# Altium PCB A3000_Backplane.PcbDoc
Units mm, origin at the board's own origin, x right, y up, seen from the top; angles counter-clockwise.
Board outline 251.97 x 57.53 mm, 4 copper layers (Top Layer, 5V, 12V, Bottom Layer), stack 1.741 mm thick; 13 components, 62 nets, 302 pads, 119 vias.
Unrouted connection lines stored in the file: 2.
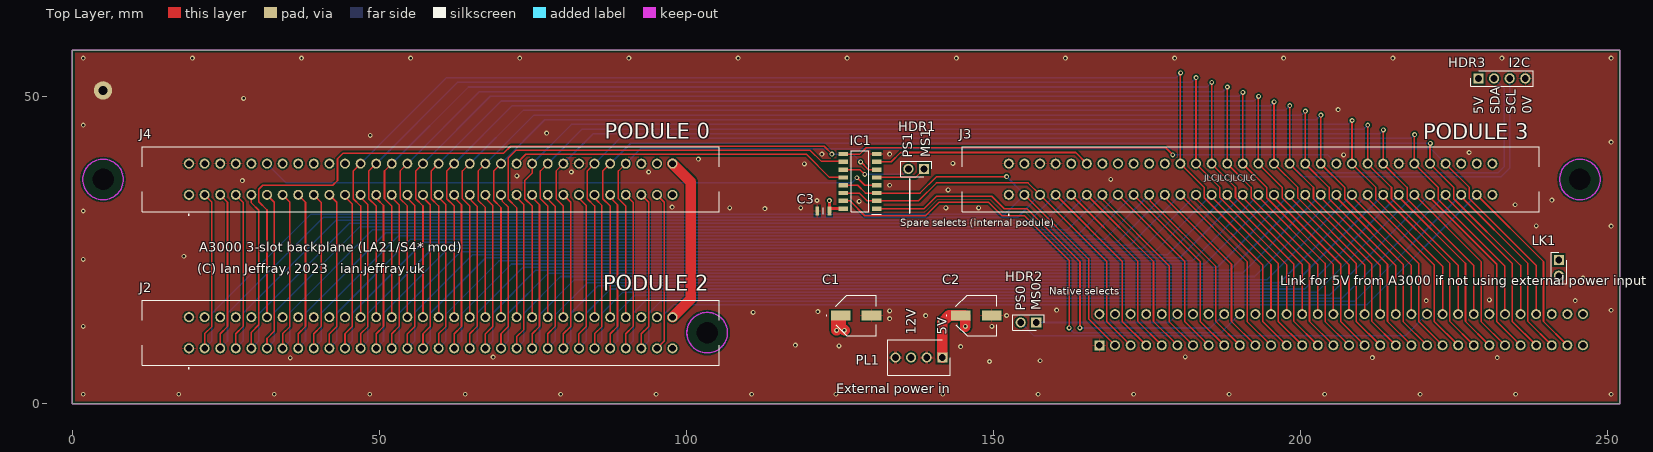
[diagram p0: Top Layer view]
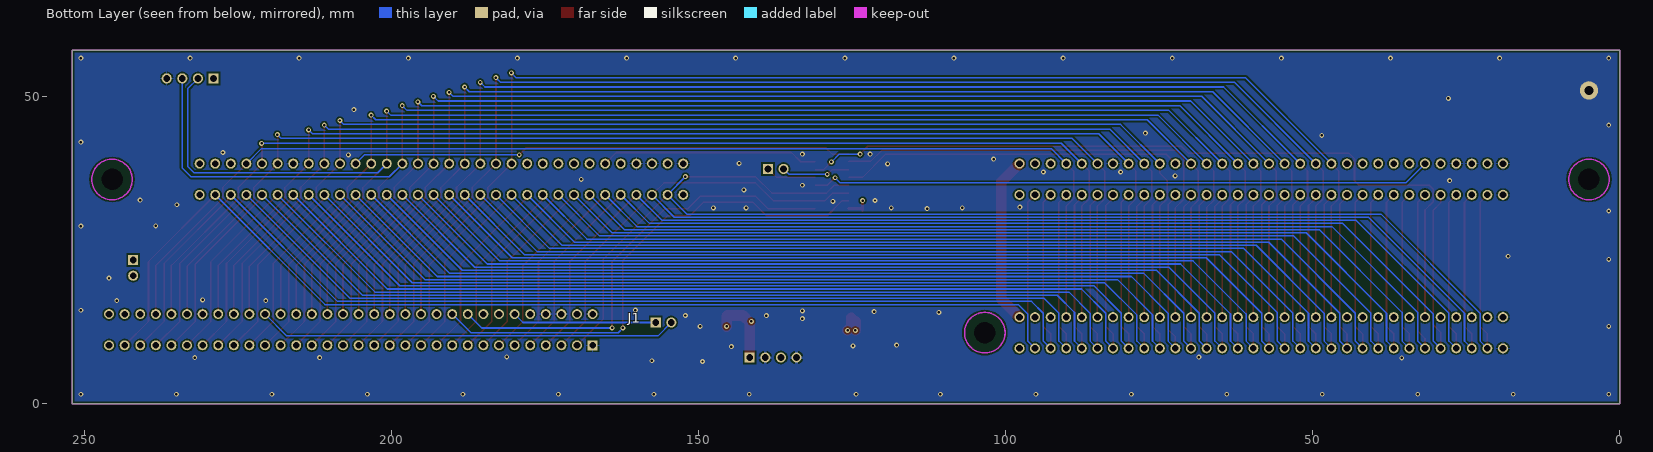
[diagram p1: Bottom Layer view, seen from below]
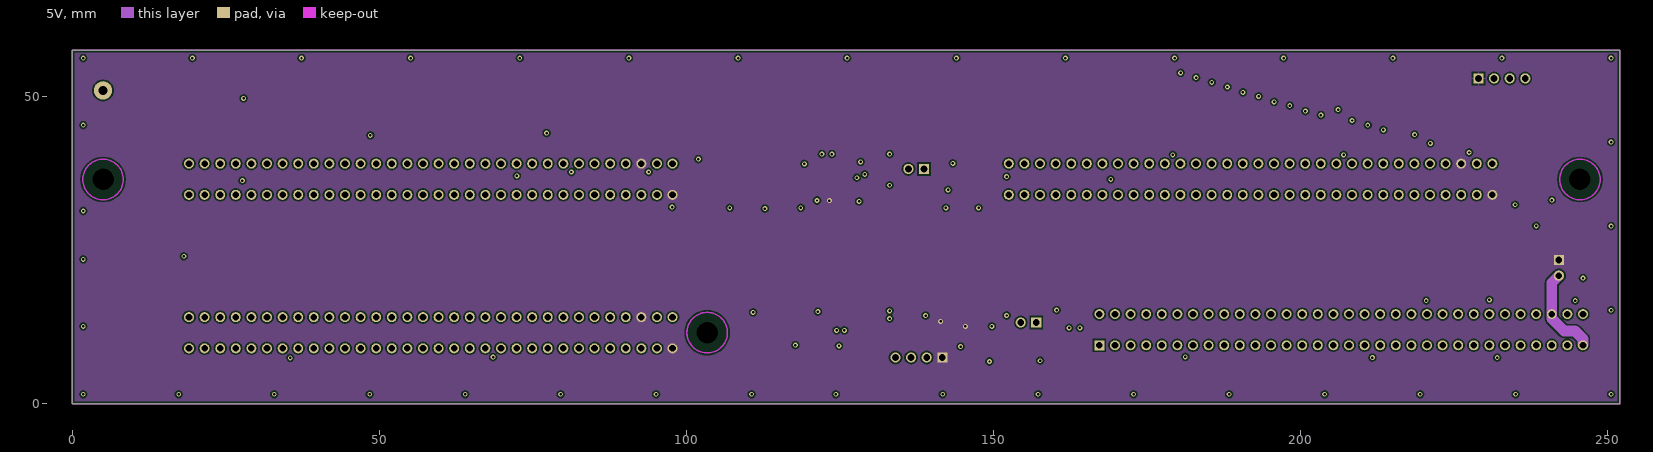
[diagram p2: 5V]
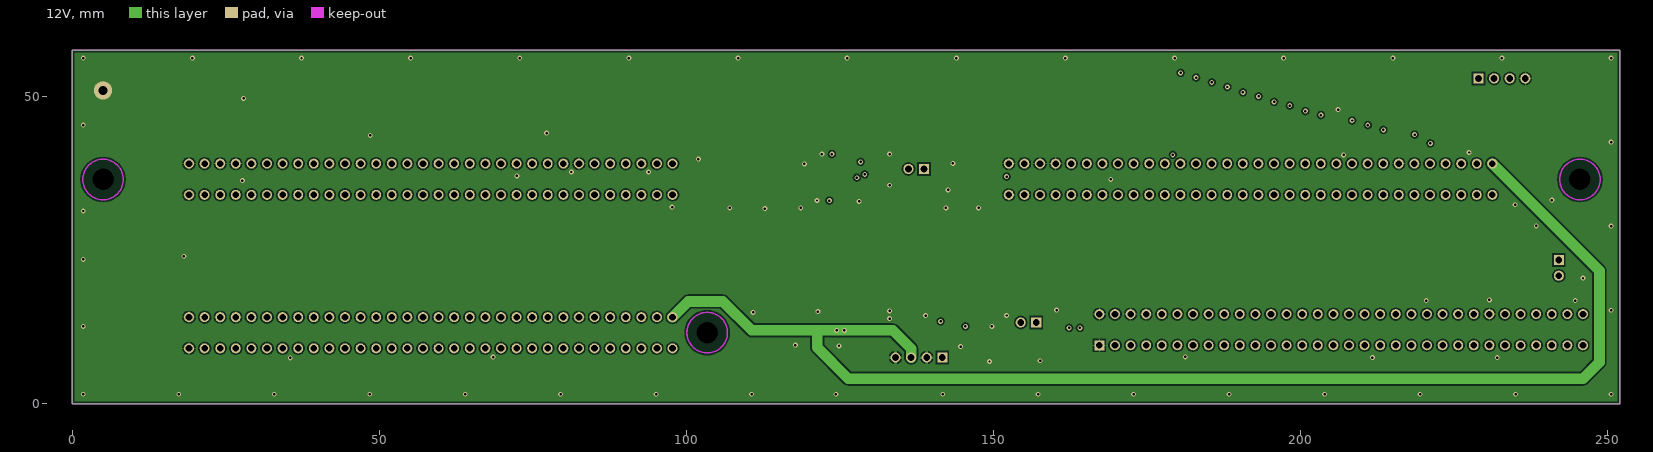
[diagram p3: 12V]
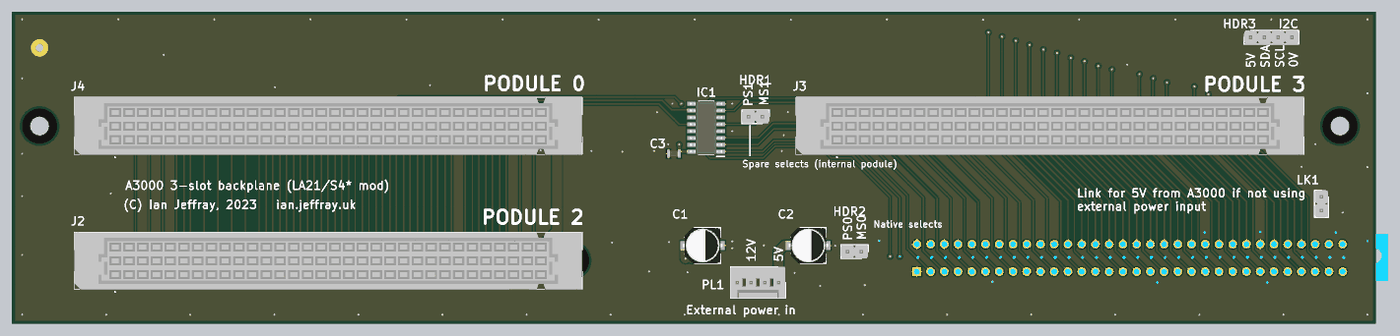
[diagram p4: 3D render of the assembled board from above, using the file's embedded part models]

## Layer stack, top to bottom
Top Solder: solder mask 0.0102, Solder Resist, Dk 3.5
Top Layer: signal copper 0.0356
Dielectric 1: dielectric 0.2, FR-4, Dk 4.8
5V: signal copper 0.035
Dielectric 2: core 1.2, PP-006, Dk 4.1
12V: signal copper 0.035
Dielectric2: dielectric 0.2, FR-4, Dk 4.8
Bottom Layer: signal copper 0.0356
Bottom Solder: solder mask 0.0102, Solder Resist, Dk 3.5

## Board outline
0,0 0,57.531 251.968,57.531 251.968,0

## Design rules (kind name [scope] priority, off if disabled: settings)
Clearance [All] p1: gap=0.254 ignorepadtopadclearanceinfootprint=FALSE except(0: Arc-Hole Track-Hole SMDPad-Hole THPad-Hole Via-Hole Fill-Hole Poly-Hole Region-Hole Text-Hole)
PolygonConnect [All] p1: connectstyle=Relief reliefconductorwidth=0.254 reliefentries=4 polygonreliefangle="90 Angle" airgapwidth=0.254
RoutingVias [All] p1: holewidth=0.711 width=1.27 viastyle="Through Hole" minholewidth=0.711 minwidth=1.27 maxholewidth=0.711 maxwidth=1.27
SolderMaskExpansion [All] p1: expansion=0.102 istentingtop=FALSE
Width [All] p1: maxlimit=0.254 minlimit=0.254 preferedwidth=0.254
30 further rules are at their usual default settings.

## Classes and differential pairs
component class A3000_Backplane: C3 HDR1 HDR2 HDR3 IC1 J1 J2 J3 J4 LK1 PL1

## Components (designator, comment, footprint, x,y, rotation, side; value= is the part's Value field where it differs from the comment)
C1 "100uF" EEE0JA331XP 127.635,14.351 r0 top
C2 "100uF" EEE0JA331XP 147.193,14.351 r0 top
C3 "100nF" CAPC2012X145N 122.301,31.369 r0 top
HDR1 "90120-0762" HDRV2W35P0X254_1X2_508X249X560P 138.684,38.227 r180 top
HDR2 "90120-0762" HDRV2W35P0X254_1X2_508X249X560P 156.972,13.208 r180 top
HDR3 "90120-0764" HDRV4W90P0X254_1X4_994X249X560P 228.981,52.959 r0 top
IC1 "74HC139D" SOIC127P600X175-16N 128.27,36.195 r180 top locked
J1 "09731646907" 56509455 167.25,9.5 r180 bottom
J2 "5650956-5" 56509565 19,9 r180 top locked
J3 "5650956-5" 56509565 152.5,34 r180 top locked
J4 "5650956-5" 56509565 19,34 r180 top locked
LK1 "90120-0762" HDRV2W35P0X254_1X2_508X249X560P 242.062,23.368 r270 top
PL1 "22-27-2041" SHDR4W64P0X254_1X4_1016X580X1170P 141.669,7.504 r180 top

## Footprints (in the part's own frame and the unit in brackets; to place one, negate y for a bottom-side part, rotate by r counter-clockwise, add the part's x,y. Pads: shape width x height; smd on the part's side, far side on the other; paste and mask are expansions set on the pad)
56509455 [mm]
  rect 1.62x1.62 hole 1.08: A1(0,0)
  round 1.62 hole 1.08: A2(-2.54,0) A3(-5.08,0) A4(-7.62,0) A5(-10.16,0) A6(-12.7,0) A7(-15.24,0) A8(-17.78,0) A9(-20.32,0) A10(-22.86,0) A11(-25.4,0) A12(-27.94,0) A13(-30.48,0) A14(-33.02,0) A15(-35.56,0) A16(-38.1,0) A17(-40.64,0) A18(-43.18,0) A19(-45.72,0) A20(-48.26,0) A21(-50.8,0) A22(-53.34,0) A23(-55.88,0) A24(-58.42,0) A25(-60.96,0) A26(-63.5,0) A27(-66.04,0) A28(-68.58,0) A29(-71.12,0) A30(-73.66,0) A31(-76.2,0) A32(-78.74,0) C1(0,5.08) C2(-2.54,5.08) C3(-5.08,5.08) C4(-7.62,5.08) C5(-10.16,5.08) C6(-12.7,5.08) C7(-15.24,5.08) C8(-17.78,5.08) C9(-20.32,5.08) C10(-22.86,5.08) C11(-25.4,5.08) C12(-27.94,5.08) C13(-30.48,5.08) C14(-33.02,5.08) C15(-35.56,5.08) C16(-38.1,5.08) C17(-40.64,5.08) C18(-43.18,5.08) C19(-45.72,5.08) C20(-48.26,5.08) C21(-50.8,5.08) C22(-53.34,5.08) C23(-55.88,5.08) C24(-58.42,5.08) C25(-60.96,5.08) C26(-63.5,5.08) C27(-66.04,5.08) C28(-68.58,5.08) C29(-71.12,5.08) C30(-73.66,5.08) C31(-76.2,5.08) C32(-78.74,5.08)
  body extent -87.07,-2.9 7.93,8.2, height 21.6
56509565 [mm]
  round 1.62 hole 1.08: A1(0,0) A2(-2.54,0) A3(-5.08,0) A4(-7.62,0) A5(-10.16,0) A6(-12.7,0) A7(-15.24,0) A8(-17.78,0) A9(-20.32,0) A10(-22.86,0) A11(-25.4,0) A12(-27.94,0) A13(-30.48,0) A14(-33.02,0) A15(-35.56,0) A16(-38.1,0) A17(-40.64,0) A18(-43.18,0) A19(-45.72,0) A20(-48.26,0) A21(-50.8,0) A22(-53.34,0) A23(-55.88,0) A24(-58.42,0) A25(-60.96,0) A26(-63.5,0) A27(-66.04,0) A28(-68.58,0) A29(-71.12,0) A30(-73.66,0) A31(-76.2,0) A32(-78.74,0) C1(0,-5.08) C2(-2.54,-5.08) C3(-5.08,-5.08) C4(-7.62,-5.08) C5(-10.16,-5.08) C6(-12.7,-5.08) C7(-15.24,-5.08) C8(-17.78,-5.08) C9(-20.32,-5.08) C10(-22.86,-5.08) C11(-25.4,-5.08) C12(-27.94,-5.08) C13(-30.48,-5.08) C14(-33.02,-5.08) C15(-35.56,-5.08) C16(-38.1,-5.08) C17(-40.64,-5.08) C18(-43.18,-5.08) C19(-45.72,-5.08) C20(-48.26,-5.08) C21(-50.8,-5.08) C22(-53.34,-5.08) C23(-55.88,-5.08) C24(-58.42,-5.08) C25(-60.96,-5.08) C26(-63.5,-5.08) C27(-66.04,-5.08) C28(-68.58,-5.08) C29(-71.12,-5.08) C30(-73.66,-5.08) C31(-76.2,-5.08) C32(-78.74,-5.08)
  round 4.335 on Mech16: MH1(-84.365,-2.54) MH2(5.625,-2.54)
  silkscreen extent -86.37,-7.84 7.62,3.36, body extent -86.3,-7.8 7.56,2.8, height 11.58
CAPC2012X145N [mm]
  rect 0.62x1.47 smd: 1(-1,0) 2(1,0)
  silkscreen extent 0,-0.53 0,0.53, body extent -1,-0.63 1,0.63, height 1.45
EEE0JA331XP [mm]
  rect 3.2x1.6 smd: 1(-2.5,0) 2(2.5,0)
  silkscreen extent -4.88,-3.3 3.3,3.3, body extent -3.65,-3.3 3.65,3.3, height 7.7
HDRV2W35P0X254_1X2_508X249X560P [mm]
  rect 1.65x1.65 hole 1.1: 1(0,0)
  round 1.65 hole 1.1: 2(2.54,0)
  silkscreen extent -1.27,-1.27 3.81,1.27, body extent -1.26,-1.25 3.82,1.25, height 9.18
HDRV4W90P0X254_1X4_994X249X560P [mm]
  rect 1.65x1.65 hole 1.1: 1(0,0)
  round 1.65 hole 1.1: 2(2.54,0) 3(5.08,0) 4(7.62,0)
  silkscreen extent -1.27,-1.27 8.89,1.27, body extent -1.27,-1.25 8.89,1.25, height 5.3
SHDR4W64P0X254_1X4_1016X580X1170P [mm]
  rect 1.65x1.65 hole 1.1: 1(0,0)
  round 1.65 hole 1.1: 2(2.54,0) 3(5.08,0) 4(7.62,0)
  silkscreen extent -1.27,-2.9 8.89,2.9, body extent -1.27,-2.9 8.89,2.9, height 11.7
SOIC127P600X175-16N [mm]
  rect 1.55x0.7 smd: 1(-2.725,4.445) 2(-2.725,3.175) 3(-2.725,1.905) 4(-2.725,0.635) 5(-2.725,-0.635) 6(-2.725,-1.905) 7(-2.725,-3.175) 8(-2.725,-4.445) 9(2.725,-4.445) 10(2.725,-3.175) 11(2.725,-1.905) 12(2.725,-0.635) 13(2.725,0.635) 14(2.725,1.905) 15(2.725,3.175) 16(2.725,4.445)
  silkscreen extent -3.43,-4.95 1.4,5.33, body extent -3,-4.95 3,4.95, height 1.75

## Part data
C1 C2: library part EEE-TC1C101XP, "Capacitor Polarised", Manufacturer_Name=Panasonic, Mouser Part Number=667-EEE-TC1C101XP, Arrow Part Number=EEE-TC1C101XP, Arrow Price/Stock=https://www.arrow.com/en/products/eee-tc1c101xp/panasonic, Datasheet Link=http://industrial.panasonic.com/cdbs/www-data/pdf/RDE0000/ABA0000C678.pdf, Height=7.8mm, Manufacturer_Part_Number=EEE-TC1C101XP, Mouser Price/Stock=https://www.mouser.co.uk/ProductDetail/Panasonic/EEE-TC1C101XP?qs=367PjNmvCmntb8uQ4S3WYg%3D%3D
C3: library part C2012X7R2A104K125AA, "Capacitor", Manufacturer_Name=TDK, Mouser Part Number=810-C2012X7R2A104K, Arrow Part Number=C2012X7R2A104K125AA, Arrow Price/Stock=https://www.arrow.com/en/products/c2012x7r2a104k125aa/tdk, Datasheet Link=https://product.tdk.com/info/en/catalog/datasheets/mlcc_commercial_midvoltage_en.pdf, Height=1.45mm, Manufacturer_Part_Number=C2012X7R2A104K125AA, Mouser Price/Stock=https://www.mouser.co.uk/ProductDetail/TDK/C2012X7R2A104K125AA?qs=NRhsANhppD9J0ZsT2%2Fo%2F7Q%3D%3D
HDR1 HDR2 LK1: "Connector", Manufacturer_Name=Molex, Mouser Part Number=538-90120-0762, Arrow Part Number=90120-0762, Arrow Price/Stock=https://www.arrow.com/en/products/90120-0762/molex?region=nac, Datasheet Link=http://www.molex.com/pdm_docs/sd/901200762_sd.pdf, Height=5.6mm, Manufacturer_Part_Number=90120-0762, Mouser Price/Stock=https://www.mouser.co.uk/ProductDetail/Molex/90120-0762?qs=NKHyz0HolODkarWFh2VFww%3D%3D
HDR3: "Connector", Manufacturer_Name=Molex, Mouser Part Number=538-90120-0764, Datasheet Link=https://www.molex.com/webdocs/datasheets/pdf/en-us/0901200764_PCB_HEADERS.pdf, Height=5.6mm, Manufacturer_Part_Number=90120-0764, Mouser Price/Stock=https://www.mouser.co.uk/ProductDetail/Molex/90120-0764?qs=QSnLD11VNirsMTdnHEPG3Q%3D%3D
IC1: "Integrated Circuit", Manufacturer_Name=Nexperia, Mouser Part Number=771-74HC139D, Datasheet Link=https://componentsearchengine.com/Datasheets/2/74HC139D.pdf, Height=1.75mm, Manufacturer_Part_Number=74HC139D, Mouser Price/Stock=https://www.mouser.co.uk/ProductDetail/Nexperia/74HC139D?qs=KBAwV6Cvgt1hUs7HUiOTFA%3D%3D
J1: library part 5650945-5, "Connector"
J2 J3 J4: "Connector", Manufacturer_Name="TE Connectivity", Mouser Part Number=571-5650956-5, Datasheet Link=https://componentsearchengine.com/Datasheets/2/5650956-5.pdf, Height=11.51mm, Manufacturer_Part_Number=5650956-5, Mouser Price/Stock=https://www.mouser.co.uk/ProductDetail/TE-Connectivity/5650956-5?qs=U4pz39agNJCw%2F9%252BN9Cdy%2Fg%3D%3D
PL1: "Connector", Manufacturer_Name=Molex, Mouser Part Number=538-22-27-2041, Datasheet Link=https://www.molex.com/pdm_docs/sd/022272041_sd.pdf, Height=11.7mm, Manufacturer_Part_Number=22-27-2041, Mouser Price/Stock=https://www.mouser.co.uk/ProductDetail/Molex/22-27-2041?qs=hSmm4fxMIuMKVUQkn4wbYQ%3D%3D

## Free pads (board coordinates)
  round 1.524 hole 3.5 unplated mask+2.5: 2(5,36.5) 2(103.378,11.557) 2(245.5,36.5)
  round 3 hole 1.5: 3(5,51)

## Via types
v1: diameter 0.8, hole 0.4, Top Layer to Bottom Layer, tented both sides, 119 vias

## Nets (pads, with @x,y where several pads share a name; then routed paths per layer and width w, separated by ;. In a path a pad name is that pad's centre, name@x,y a point inside that pad or via, vN(x,y) a via of type N, cw(c..) or ccw(c..) an arc to the next point about the centre after c; other vN are vias at no path point)
0V: C1.2 C2.2 C3.1 HDR3.4 IC1.8 J1.A1 J1.C1 J1.C3 J1.C4 J1.C26 J2.A1 J2.C1 J2.C3 J2.C4 J2.C26 J3.A1 J3.C1 J3.C3 J3.C4 J3.C26 J4.A1 J4.C1 J4.C3 J4.C4 J4.C26 pad.3 PL1.2 PL1.4
  other v1: 1.778,1.524 17.328,1.524 32.877,1.524 48.427,1.524 63.976,1.524 79.526,1.524 95.075,1.524 110.625,1.524 124.333,1.524 141.732,1.524 157.282,1.524 172.831,1.524 188.381,1.524 203.93,1.524 219.48,1.524 235.029,1.524 250.571,1.524 149.352,6.858 157.607,6.985 35.487,7.448 211.709,7.493 232.029,7.493 68.507,7.575 181.229,7.62 144.653,9.271 124.841,9.398 117.729,9.525 1.778,12.573 149.733,12.573 133.096,13.843 138.944,14.345 152.146,14.351 110.871,14.859 121.412,14.986 133.096,15.113 250.571,15.208 160.274,15.24 220.472,16.764 244.729,16.764 230.759,16.891 245.999,20.447 1.778,23.495 18.167,23.997 250.571,28.892 238.379,28.956 1.778,31.369 112.776,31.75 107.061,31.877 118.618,31.877 142.24,31.877 147.574,31.877 97.663,32.004 234.95,32.385 128.121,32.921 121.262,33.078 240.925,33.141 142.621,34.798 133.096,35.56 27.692,36.316 169.091,36.531 72.39,37.084 81.28,37.719 93.853,37.719 119.215,39.048 143.383,39.116 101.958,39.809 207.01,40.513 122.047,40.64 133.096,40.64 227.457,40.894 250.571,42.577 48.52,43.682 77.222,44.063 1.778,45.339 206.127,47.873 27.902,49.716 1.778,56.261 19.549,56.261 37.32,56.261 55.091,56.261 72.862,56.261 90.633,56.261 108.404,56.261 126.174,56.261 143.945,56.261 161.716,56.261 179.487,56.261 197.258,56.261 215.029,56.261 232.8,56.261 250.571,56.261
5V: C2.1 C3.2 HDR3.1 IC1.16 J2.A32 J2.C30 J3.A32 J3.C30 J4.A32 J4.C30 LK1.1 PL1.1 | length 16.7
  Top Layer w0.254: C3.2 123.301,31.567 C3.2@123.484,31.75 ; v1@123.301,33.004 v1@123.317,33.02 ; C2.1 144.869,14.351 C2.1@145.542,13.678
  Top Layer w0.5: C3.2@123.301,31.567 v1@123.301,33.004 ; C3.2@123.484,31.75 IC1.16
  Top Layer w1.75: PL1.1 141.669,13.272 142.748,14.351 C2.1 ; C2.1@144.869,14.351 145.34,14.351 145.415,14.276 v1@145.415,12.545
  other v1: 145.438,12.581 141.396,13.385 123.286,33.07
5V_MOBO: J1.A32 J1.C30 LK1.2 | length 14.8
  5V w1.75: J1.C30 240.91,19.676 LK1.2 ; J1.C30@240.919,14.58 240.919,13.843 242.951,11.811 244.711,11.811 245.99,10.532 J1.A32@245.99,9.652
12V: C1.1 J2.C32 J3.C32 J4.C32 PL1.3 | length 248.7
  Top Layer w1.75: J2.C32 100.711,17.051 100.711,36.109 J4.C32 ; 124.41,13.429 124.41,11.988 v1(124.46,11.938) ; C1.1@125.135,13.97 125.135,12.533 v1(125.73,11.938)
  12V w1.75: J2.C32 100.297,16.637 105.918,16.637 110.617,11.938 121.285,11.938 ; PL1.3 136.589,8.953 133.604,11.938 v1(125.73,11.938) v1(124.46,11.938) 121.285,11.938 ; J3.C32 248.666,21.654 248.666,6.731 245.999,4.064 126.365,4.064 121.285,9.144 121.285,11.938
/IOGT: J1.C23 J2.C23 J3.C23 J4.C23 | length 200.1
  Top Layer w0.254: J2.C23 74.88,32.178 73.689,33.369 73.689,36.351 74.88,37.542 J4.C23 ; v1@208.38,46.101 J3.C23 212.269,35.191 212.269,33.222 223.13,22.361 J1.C23
  Bottom Layer w0.254: J4.C23 81.266,45.466 207.772,45.466 v1(208.407,46.101)
/IORQ: J1.C24 J2.C24 J3.C24 J4.C24 | length 199
  Top Layer w0.254: J2.C24 77.42,32.178 76.229,33.369 76.229,37.889 J4.C24 ; v1@210.92,45.339 J3.C24 214.809,35.191 214.809,33.349 225.67,22.488 J1.C24
  Bottom Layer w0.254: J4.C24 83.044,44.704 210.312,44.704 v1(210.947,45.339)
/MS0: IC1.4 J4.C6 | length 101.4
  Top Layer w0.254: v1@127.799,36.793 129.032,35.56 IC1.4
  Bottom Layer w0.254: J4.C6 34.839,35.941 126.912,35.941 v1(127.757,36.786)
/MS1: HDR1.1 IC1.5 | length 8.3
  Top Layer w0.254: IC1.5 137.287,36.83 HDR1.1
/MS2: IC1.6 J2.C6 | length 128.6
  Top Layer w0.254: J2.C6 31.7,31.546 30.353,32.893 30.353,34.925 30.988,35.56 42.418,35.56 43.18,36.322 43.18,39.878 44.069,40.767 70.231,40.767 71.374,41.91 122.428,41.91 v1(123.698,40.64) ; v1@128.397,39.37 129.667,38.1 IC1.6
  Bottom Layer w0.254: v1(123.698,40.64) 127.078,40.64 v1(128.355,39.362)
/MS3: IC1.7 J3.C6 | length 35.6
  Top Layer w0.254: IC1.7 133.35,39.37 134.874,40.894 163.386,40.894 J3.C6
/PFIQ: J1.C17 J2.C17 J3.C17 J4.C17 | length 205.6
  Top Layer w0.254: J2.C17 59.64,32.178 58.449,33.369 58.449,37.889 J4.C17 ; v1@193.14,50.038 J3.C17 197.029,35.191 197.029,33.476 207.89,22.615 J1.C17
  Bottom Layer w0.254: J4.C17 69.836,49.276 192.405,49.276 v1(193.167,50.038)
/PIRQ: J1.C16 J2.C16 J3.C16 J4.C16 | length 206.5
  Top Layer w0.254: J2.C16 57.1,32.178 55.909,33.369 55.909,37.889 J4.C16 ; v1@190.6,50.65 J3.C16 194.489,35.191 194.489,33.507 205.35,22.646 J1.C16
  Bottom Layer w0.254: J4.C16 68.058,50.038 189.992,50.038 v1(190.627,50.673)
/PRE: J1.C15 J2.C15 J3.C15 J4.C15 | length 207.8
  Top Layer w0.254: J2.C15 54.56,32.178 53.369,33.369 53.369,37.889 J4.C15 ; v1@188.06,51.562 J3.C15 191.949,35.191 191.949,33.507 202.81,22.646 J1.C15
  Bottom Layer w0.254: J4.C15 66.28,50.8 187.325,50.8 v1(188.087,51.562)
/PS0: IC1.12 J4.C22 | length 55.4
  Top Layer w0.254: J4.C22 73.85,40.59 119.557,40.59 123.317,36.83 IC1.12
/PS1: HDR1.2 IC1.11 | length 11.3
  Top Layer w0.254: IC1.11 128.27,38.1 v1(129.032,37.338)
  Bottom Layer w0.254: v1(129.032,37.338) 135.255,37.338 HDR1.2@136.158,38.241
/PS2: IC1.10 J2.C22 | length 82.4
  Top Layer w0.254: J2.C22 72.34,31.927 70.993,33.274 70.993,40.005 72.263,41.275 120.142,41.275 121.92,39.497 125.418,39.497 IC1.10
/PS3: IC1.9 J3.C22 | length 81.8
  Top Layer w0.254: IC1.9 128.248,40.64 129.264,41.656 178.054,41.656 v1(179.197,40.513)
  Bottom Layer w0.254: v1(179.197,40.513) 204.407,40.513 J3.C22
/PWE: J1.C14 J2.C14 J3.C14 J4.C14 | length 208.9
  Top Layer w0.254: J2.C14 52.02,32.178 50.829,33.369 50.829,37.889 J4.C14 ; v1@185.52,52.324 J3.C14 189.409,35.191 189.409,33.507 200.27,22.646 J1.C14
  Bottom Layer w0.254: J4.C14 64.502,51.562 184.785,51.562 v1(185.547,52.324)
/RST: J1.C12 J2.C12 J3.C12 J4.C12 | length 211
  Top Layer w0.254: J2.C12 46.94,32.178 45.749,33.369 45.749,37.889 J4.C12 ; v1@180.44,53.848 J3.C12 184.329,35.191 184.329,33.507 195.19,22.646 J1.C12
  Bottom Layer w0.254: J4.C12 60.946,53.086 179.705,53.086 v1(180.467,53.848)
/S4: IC1.15 J1.C10 | length 83
  Top Layer w0.254: IC1.15 126.619,33.02 129.032,30.607 138.938,30.607 141.097,32.766 149.225,32.766 151.384,30.607 151.765,30.607 155.067,30.607 162.306,23.368 v1(162.306,12.319)
  Bottom Layer w0.254: v1(162.306,12.319) 162.306,12.295 163.063,11.538 187.068,11.538 J1.C10
/S6_UNIX: J1.C18 J2.C18 J3.C18 J4.C18 | length 204.4
  Top Layer w0.254: J2.C18 62.18,32.178 60.989,33.369 60.989,37.889 J4.C18 ; v1@195.68,49.149 J3.C18 199.569,35.191 199.569,33.476 210.43,22.615 J1.C18
  Bottom Layer w0.254: J4.C18 71.614,48.514 195.072,48.514 v1(195.707,49.149)
/S7: J1.C21 J2.C21 J3.C21 J4.C21 | length 201.3
  Top Layer w0.254: J2.C21 69.8,31.927 68.609,33.118 68.609,37.889 J4.C21 ; v1@203.3,46.99 J3.C21 207.189,35.191 207.189,33.349 218.05,22.488 J1.C21
  Bottom Layer w0.254: J4.C21 76.948,46.228 202.565,46.228 v1(203.327,46.99)
BD0: J1.A31 J2.A31 J3.A31 J4.A31 | length 203
  Top Layer w0.254: J2.A31 96.391,10.191 96.391,32.809 J4.A31 ; J3.A31 239.561,23.139 239.561,13.389 J1.A31
  Bottom Layer w0.254: J2.A31 96.393,10.193 96.393,14.605 97.917,16.129 210.829,16.129 J3.A31
BD1: J1.A30 J2.A30 J3.A30 J4.A30 | length 203.1
  Top Layer w0.254: J2.A30 92.66,11.376 93.851,12.567 93.851,32.809 J4.A30 ; J3.A30 226.16,33.682 237.021,22.821 237.021,13.389 J1.A30
  Bottom Layer w0.254: J2.A30 93.853,10.193 93.853,14.732 95.758,16.637 208.797,16.637 J3.A30
BD2: J1.A29 J2.A29 J3.A29 J4.A29 | length 203.1
  Top Layer w0.254: J2.A29 90.12,11.376 91.311,12.567 91.311,32.809 J4.A29 ; J3.A29 223.62,33.682 234.481,22.821 234.481,13.389 J1.A29
  Bottom Layer w0.254: J2.A29 91.313,10.193 91.313,14.732 93.726,17.145 206.765,17.145 J3.A29
BD3: J1.A28 J2.A28 J3.A28 J4.A28 | length 203.2
  Top Layer w0.254: J2.A28 87.58,11.376 88.771,12.567 88.771,32.387 87.957,33.201 87.957,33.253 87.58,33.63 J4.A28 ; J3.A28 221.08,33.63 221.446,33.265 221.446,33.189 231.941,22.694 231.941,13.389 J1.A28
  Bottom Layer w0.254: J2.A28 88.773,10.193 88.773,14.859 91.567,17.653 204.733,17.653 J3.A28
BD4: J1.A27 J2.A27 J3.A27 J4.A27 | length 203.1
  Top Layer w0.254: J2.A27 85.04,11.376 86.231,12.567 86.231,32.26 85.301,33.19 85.301,33.739 J4.A27 ; J3.A27 229.401,23.139 229.401,13.389 J1.A27
  Bottom Layer w0.254: J2.A27 86.233,10.193 86.233,14.732 89.662,18.161 202.701,18.161 J3.A27
BD5: J1.A26 J2.A26 J3.A26 J4.A26 | length 203.1
  Top Layer w0.254: J2.A26 82.5,11.376 83.691,12.567 83.691,32.26 82.761,33.189 82.761,33.739 J4.A26 ; J3.A26 216,33.682 226.861,22.821 226.861,13.389 J1.A26
  Bottom Layer w0.254: J2.A26 83.691,10.191 83.691,14.73 87.63,18.669 200.669,18.669 J3.A26
BD6: J1.A25 J2.A25 J3.A25 J4.A25 | length 203.1
  Top Layer w0.254: J2.A25 79.96,11.376 81.151,12.567 81.151,32.809 J4.A25 ; J3.A25 213.46,33.682 224.321,22.821 224.321,13.389 J1.A25
  Bottom Layer w0.254: J2.A25 81.153,10.193 81.153,14.732 85.598,19.177 198.637,19.177 J3.A25
BD7: J1.A24 J2.A24 J3.A24 J4.A24 | length 202.9
  Top Layer w0.254: J2.A24 77.42,11.376 78.611,12.567 78.611,32.133 77.67,33.074 77.67,33.75 J4.A24 ; J3.A24 211.181,33.739 211.181,33.167 221.781,22.567 221.781,13.389 J1.A24
  Bottom Layer w0.254: J2.A24 78.611,10.191 78.611,14.415 83.881,19.685 196.605,19.685 J3.A24
BD8: J1.A23 J2.A23 J3.A23 J4.A23 | length 203
  Top Layer w0.254: J2.A23 74.88,11.376 76.071,12.567 76.071,32.387 75.257,33.201 75.257,33.253 74.88,33.63 J4.A23 ; J3.A23 208.38,33.682 219.241,22.821 219.241,13.389 J1.A23
  Bottom Layer w0.254: J2.A23 76.071,10.191 76.071,14.476 81.788,20.193 194.573,20.193 J3.A23
BD9: J1.A22 J2.A22 J3.A22 J4.A22 | length 203.1
  Top Layer w0.254: J2.A22 72.34,10.872 73.531,12.063 73.531,32.387 72.717,33.201 72.717,33.253 72.34,33.63 J4.A22 ; J3.A22 205.84,33.63 206.206,33.265 206.206,33.189 216.701,22.694 216.701,13.389 J1.A22
  Bottom Layer w0.254: J2.A22 73.533,10.193 73.533,14.732 79.502,20.701 192.541,20.701 J3.A22
BD10: J1.A21 J2.A21 J3.A21 J4.A21 | length 203.1
  Top Layer w0.254: J2.A21 69.8,11.376 70.991,12.567 70.991,32.006 69.987,33.01 69.987,33.813 J4.A21 ; J3.A21 203.3,33.63 203.666,33.265 203.666,33.189 214.161,22.694 214.161,13.389 J1.A21
  Bottom Layer w0.254: J2.A21 70.993,10.193 70.993,14.732 77.47,21.209 190.509,21.209 J3.A21
BD11: J1.A20 J2.A20 J3.A20 J4.A20 | length 203.1
  Top Layer w0.254: J2.A20 67.26,11.376 68.451,12.567 68.451,32.26 67.521,33.19 67.521,33.739 J4.A20 ; J3.A20 200.76,33.63 201.126,33.265 201.126,33.189 211.621,22.694 211.621,13.389 J1.A20
  Bottom Layer w0.254: J2.A20 68.451,10.191 68.451,14.73 75.438,21.717 188.477,21.717 J3.A20
BD12: J1.A19 J2.A19 J3.A19 J4.A19 | length 203.1
  Top Layer w0.254: J2.A19 64.72,11.376 65.911,12.567 65.911,32.133 64.97,33.074 64.97,33.75 J4.A19 ; J3.A19 198.22,33.682 209.081,22.821 209.081,13.389 J1.A19
  Bottom Layer w0.254: J2.A19 65.913,10.193 65.913,14.732 73.406,22.225 186.445,22.225 J3.A19
BD13: J1.A18 J2.A18 J3.A18 J4.A18 | length 203
  Top Layer w0.254: J2.A18 62.18,11.376 63.371,12.567 63.371,32.387 62.557,33.201 62.557,33.253 62.18,33.63 J4.A18 ; J3.A18 195.68,33.63 196.046,33.265 196.046,33.189 206.541,22.694 206.541,13.389 J1.A18
  Bottom Layer w0.254: J2.A18 63.371,10.191 63.371,14.603 71.501,22.733 184.413,22.733 J3.A18
BD14: J1.A17 J2.A17 J3.A17 J4.A17 | length 203
  Top Layer w0.254: J2.A17 59.64,11.376 60.831,12.567 60.831,32.387 60.017,33.201 60.017,33.253 59.64,33.63 J4.A17 ; J3.A17 193.14,33.682 204.001,22.821 204.001,13.389 J1.A17
  Bottom Layer w0.254: J2.A17 60.831,10.191 60.831,14.603 69.469,23.241 182.381,23.241 J3.A17
BD15: J1.A16 J2.A16 J3.A16 J4.A16 | length 203.1
  Top Layer w0.254: J2.A16 57.1,11.376 58.291,12.567 58.291,32.387 57.477,33.201 57.477,33.253 57.1,33.63 J4.A16 ; J3.A16 190.6,33.63 190.966,33.265 190.966,33.189 201.461,22.694 201.461,13.389 J1.A16
  Bottom Layer w0.254: J2.A16 58.293,10.193 58.293,14.732 67.31,23.749 180.349,23.749 J3.A16
BL: J1.C25 J2.C25 J3.C25 J4.C25 | length 197.9
  Top Layer w0.254: J2.C25 79.96,32.178 78.769,33.369 78.769,37.889 J4.C25 ; v1@213.46,44.577 J3.C25 217.349,35.191 217.349,33.349 228.21,22.488 J1.C25
  Bottom Layer w0.254: J4.C25 84.822,43.942 212.852,43.942 v1(213.487,44.577)
C0: HDR3.2 J1.C20 J2.C20 J3.C20 J4.C20 | length 250.7
  Top Layer w0.254: J2.C20 67.26,31.927 66.069,33.118 66.069,37.889 J4.C20 ; v1@200.76,47.625 J3.C20 204.649,35.191 204.649,33.349 215.51,22.488 J1.C20
  Bottom Layer w0.254: J4.C20 75.17,46.99 200.152,46.99 v1(200.787,47.625) ; J3.C20 202.248,37.592 232.156,37.592 233.172,38.608 233.172,51.308 HDR3.2
C1: HDR3.3 J1.C19 J2.C19 J3.C19 J4.C19 | length 255.4
  Top Layer w0.254: J2.C19 64.72,32.178 63.529,33.369 63.529,37.889 J4.C19 ; v1@198.22,48.514 J3.C19 202.109,35.191 202.109,33.349 212.97,22.488 J1.C19
  Bottom Layer w0.254: J4.C19 73.392,47.752 197.485,47.752 v1(198.247,48.514) ; J3.C19 200.343,36.957 232.664,36.957 234.061,38.354 HDR3.3
CLK2: J1.C27 J2.C27 J3.C27 J4.C27 | length 196.8
  Top Layer w0.254: J2.C27 85.04,32.178 83.849,33.369 83.849,37.889 J4.C27 ; v1@218.54,43.815 J3.C27 222.429,35.191 222.429,33.222 233.29,22.361 J1.C27
  Bottom Layer w0.254: J4.C27 89.14,43.18 217.932,43.18 v1(218.567,43.815)
CLK8: J1.C28 J2.C28 J3.C28 J4.C28 | length 194.8
  Top Layer w0.254: J2.C28 87.58,32.178 86.389,33.369 86.389,37.889 J4.C28 ; v1@221.08,42.418 J3.C28 224.969,35.191 224.969,33.349 235.83,22.488 J1.C28
  Bottom Layer w0.254: J4.C28 90.918,42.418 v1@221.107,42.418
  other v1: 221.152,42.38
LA2: J1.A15 J2.A15 J3.A15 J4.A15 | length 203.2
  Top Layer w0.254: J2.A15 54.56,11.376 55.751,12.567 55.751,32.26 54.821,33.19 54.821,33.739 J4.A15 ; J3.A15 188.06,33.63 188.426,33.265 188.426,33.189 198.921,22.694 198.921,13.389 J1.A15
  Bottom Layer w0.254: J2.A15 55.751,10.191 55.751,14.857 65.151,24.257 178.317,24.257 J3.A15
LA3: J1.A14 J2.A14 J3.A14 J4.A14 | length 203.1
  Top Layer w0.254: J2.A14 52.02,11.376 53.211,12.567 53.211,32.387 52.397,33.201 52.397,33.253 52.02,33.63 J4.A14 ; J3.A14 185.52,33.682 196.381,22.821 196.381,13.389 J1.A14
  Bottom Layer w0.254: J2.A14 53.213,10.193 53.213,14.732 63.246,24.765 176.285,24.765 J3.A14
LA4: J1.A13 J2.A13 J3.A13 J4.A13 | length 203.1
  Top Layer w0.254: J2.A13 49.48,11.376 50.671,12.567 50.671,32.26 49.741,33.19 49.741,33.739 J4.A13 ; J3.A13 183.241,33.739 183.241,33.167 193.841,22.567 193.841,13.389 J1.A13
  Bottom Layer w0.254: J2.A13 50.671,10.191 50.671,14.73 61.214,25.273 174.253,25.273 J3.A13
LA5: J1.A12 J2.A12 J3.A12 J4.A12 | length 203.1
  Top Layer w0.254: J2.A12 46.94,11.376 48.131,12.567 48.131,32.387 47.317,33.201 47.317,33.253 46.94,33.63 J4.A12 ; J3.A12 191.301,23.139 191.301,13.389 J1.A12
  Bottom Layer w0.254: J2.A12 48.133,10.193 48.133,14.732 59.182,25.781 172.221,25.781 J3.A12
LA6: J1.A11 J2.A11 J3.A11 J4.A11 | length 203.1
  Top Layer w0.254: J2.A11 44.4,11.376 45.591,12.567 45.591,32.514 44.4,33.705 J4.A11 ; J3.A11 177.9,33.63 178.266,33.265 178.266,33.189 188.761,22.694 188.761,13.389 J1.A11
  Bottom Layer w0.254: J2.A11 45.591,10.191 45.591,14.73 57.15,26.289 170.189,26.289 J3.A11
LA7: J1.A10 J2.A10 J3.A10 J4.A10 | length 203.1
  Top Layer w0.254: J2.A10 41.86,11.376 43.051,12.567 43.051,32.809 J4.A10 ; J3.A10 175.535,33.825 175.535,32.999 186.221,22.313 186.221,13.389 J1.A10
  Bottom Layer w0.254: J2.A10 43.053,10.193 43.053,14.732 55.118,26.797 168.157,26.797 J3.A10
LA8: J1.A9 J2.A9 J3.A9 J4.A9 | length 203.1
  Top Layer w0.254: J2.A9 39.32,11.376 40.511,12.567 40.511,32.809 J4.A9 ; J3.A9 183.681,23.139 183.681,13.389 J1.A9
  Bottom Layer w0.254: J2.A9 40.511,10.191 40.511,14.73 53.086,27.305 166.125,27.305 J3.A9
LA9: J1.A8 J2.A8 J3.A8 J4.A8 | length 203.1
  Top Layer w0.254: J2.A8 36.78,11.376 37.971,12.567 37.971,32.809 J4.A8 ; J3.A8 181.141,23.139 181.141,13.389 J1.A8
  Bottom Layer w0.254: J2.A8 37.971,10.191 37.971,14.73 51.054,27.813 164.093,27.813 J3.A8
LA10: J1.A7 J2.A7 J3.A7 J4.A7 | length 203.2
  Top Layer w0.254: J2.A7 34.24,11.376 35.431,12.567 35.431,32.809 J4.A7 ; J3.A7 167.979,33.761 167.979,33.062 178.601,22.44 178.601,13.389 J1.A7
  Bottom Layer w0.254: J2.A7 35.431,10.191 35.431,14.857 48.895,28.321 162.061,28.321 J3.A7
LA11: J1.A6 J2.A6 J3.A6 J4.A6 | length 203.2
  Top Layer w0.254: J2.A6 31.7,10.618 32.891,11.809 32.891,32.809 J4.A6 ; J3.A6 176.061,23.139 176.061,13.389 J1.A6
  Bottom Layer w0.254: J2.A6 32.891,10.191 32.891,14.857 46.863,28.829 160.029,28.829 J3.A6
LA12: J1.A5 J2.A5 J3.A5 J4.A5 | length 203
  Top Layer w0.254: J2.A5 29.16,11.634 30.351,12.825 30.351,31.498 29.16,32.689 J4.A5 ; J3.A5 173.521,23.139 173.521,13.389 J1.A5
  Bottom Layer w0.254: J2.A5 30.351,10.191 30.351,14.603 45.085,29.337 157.997,29.337 J3.A5
LA13: J1.A4 J2.A4 J3.A4 J4.A4 | length 203.1
  Top Layer w0.254: J2.A4 26.62,11.376 27.811,12.567 27.811,32.809 J4.A4 ; J3.A4 170.981,23.139 170.981,13.389 J1.A4
  Bottom Layer w0.254: J2.A4 27.811,10.191 27.811,14.73 42.926,29.845 155.965,29.845 J3.A4
LA14: IC1.2 IC1.14 J1.A3 J2.A3 J3.A3 J4.A3 | length 237.7
  Top Layer w0.254: J2.A3 24.08,11.376 25.271,12.567 25.271,32.809 J4.A3 ; IC1.14 128.143,34.29 129.413,33.02 IC1.2 137.795,33.02 140.716,35.941 155.639,35.941 J3.A3 168.441,23.139 168.441,13.389 J1.A3
  Bottom Layer w0.254: J2.A3 25.271,10.191 25.271,14.73 40.894,30.353 153.933,30.353 J3.A3
LA15: IC1.3 IC1.13 J1.A2 J2.A2 J3.A2 J4.A2 | length 235.5
  Top Layer w0.254: J2.A2 21.54,11.376 22.731,12.567 22.731,32.809 J4.A2 ; IC1.13 127.889,35.56 129.159,34.29 IC1.3 138.049,34.29 140.716,36.957 v1(152.146,36.957) ; J3.A2 165.481,23.559 165.481,13.809 J1.A2
  Bottom Layer w0.254: J2.A2 22.731,10.191 22.731,14.73 38.862,30.861 151.901,30.861 J3.A2 155.04,34.032 152.146,36.926 v1(152.146,36.957)
LA21: IC1.1 J1.C9 | length 73.6
  Top Layer w0.254: IC1.1 138.684,31.75 140.716,33.782 149.733,33.782 151.765,31.75 155.448,31.75 164.084,23.114 v1(164.084,12.319)
  Bottom Layer w0.254: v1(164.084,12.319) 185.309,12.319 J1.C9
MS0_INT: HDR2.1 J1.C6 | length 23.5
  Bottom Layer w0.254: HDR2.1 178.578,13.208 J1.C6
PR/W: J1.C13 J2.C13 J3.C13 J4.C13 | length 209.9
  Top Layer w0.254: J2.C13 49.48,32.178 48.289,33.369 48.289,37.889 J4.C13 ; v1@182.98,53.086 J3.C13 186.869,35.191 186.869,33.507 197.73,22.646 J1.C13
  Bottom Layer w0.254: J4.C13 62.724,52.324 182.245,52.324 v1(183.007,53.086)
PS0_INT: HDR2.2 J1.C22 | length 68.5
  Bottom Layer w0.254: HDR2.2 156.61,11.03 217.04,11.03 J1.C22
REF8M: J1.C29 J2.C29 J3.C29 J4.C29 | length 192.1
  Top Layer w0.254: J2.C29 90.12,32.178 88.929,33.369 88.929,37.889 J4.C29 ; J3.C29 227.509,35.191 227.509,33.349 238.37,22.488 J1.C29
  Bottom Layer w0.254: J4.C29 92.569,41.529 221.171,41.529 J3.C29
pads on no net: J1.C2 J1.C5 J1.C7 J1.C8 J1.C11 J1.C31 J1.C32 J2.C2 J2.C5 J2.C7 J2.C8 J2.C9 J2.C10 J2.C11 J2.C31 J2.MH1 J2.MH2 J3.C2 J3.C5 J3.C7 J3.C8 J3.C9 J3.C10 J3.C11 J3.C31 J3.MH1 J3.MH2 J4.C2 J4.C5 J4.C7 J4.C8 J4.C9 J4.C10 J4.C11 J4.C31 J4.MH1 J4.MH2

## Polygon pours and split planes (outlines as drawn)
0V on Bottom Layer "0V_L04_P001" (solid, remove dead copper, pour order 1): 0,57.531 251.968,57.531 251.968,0 0,0
5V on 5V "5V_L02_P002" (solid, remove dead copper, pour order 2): 0,57.531 251.968,57.531 251.968,0 0,0
0V on 12V "0V_L03_P014" (solid, remove dead copper, pour order 14): 251.968,57.531 0,57.531 0,0 251.968,0
0V on Top Layer "0V_L01_P000" (solid, remove dead copper, pour order 0): 0.508,57.531 251.968,57.531 251.968,0 0.508,0

## Keep-outs
Top Layer:
  circle w0.254: c103.378,11.557 r3.3
  circle w0.254: c5,36.5 r3.3
  circle w0.254: c245.5,36.5 r3.3
5V:
  circle w0.254: c103.378,11.557 r3.3
  circle w0.254: c5,36.5 r3.3
  circle w0.254: c245.5,36.5 r3.3
12V:
  circle w0.254: c103.378,11.557 r3.3
  circle w0.254: c5,36.5 r3.3
  circle w0.254: c245.5,36.5 r3.3
Bottom Layer:
  circle w0.254: c103.378,11.557 r3.3
  circle w0.254: c245.5,36.5 r3.3
  circle w0.254: c5,36.5 r3.3
Keep-Out Layer:
  lines w0.254: 251.968,0 0,0 0,57.531 251.968,57.531 251.968,0 ; 251.968,0 251.968,0

## Silkscreen, mask and mechanical layers (free items; w line width, h text height)
Top Overlay:
  lines w0.254: 136.398,30.988 136.398,36.576
  text "I2C" at 233.934,54.737 h1.52
  text "0V" at 237.617,47.244 h1.52 r90
  text "5V" at 229.743,47.117 h1.52 r90
  text "SDA" at 232.41,47.117 h1.52 r90
  text "SCL" at 235.077,47.117 h1.52 r90
  text "PODULE 0" at 86.733,43.172 h2.5
  text "PODULE 3" at 219.956,43.045 h2.5
  text "MS1" at 139.7,40.132 h1.52 r90
  text "PS1" at 136.779,40.005 h1.52 r90
  text "JLCJLCJLCJLC" at 184.35,36.268 h1
  text "Spare selects (internal podule)" at 134.82,28.921 h1.2
  text "A3000 3-slot backplane (LA21/S4* mod)" at 20.701,24.765 h1.52
  text "(C) Ian Jeffray, 2023   ian.jeffray.uk" at 20.32,21.209 h1.52
  text "Link for 5V from A3000 if not using external power input" at 196.723,19.304 h1.52
  text "PODULE 2" at 86.479,18.407 h2.5
  text "Native selects" at 159.077,17.726 h1.2
  text "MS0" at 157.734,15.24 h1.52 r90
  text "PS0" at 155.194,15.113 h1.52 r90
  text "12V" at 137.351,11.187 h1.52 r90
  text "5V" at 142.431,11.187 h1.52 r90
  text "External power in" at 124.397,1.662 h1.52
Mechanical 3:
  the board outline again, w0.254
Board Shape:
  the board outline again, w0.254